# Altium PCB SLT_4U_PEE_V100.PcbDoc (part 6 of 7)
Units mm, origin at the board's own origin, x right, y up, seen from the top; angles counter-clockwise.
Board outline 180 x 80 mm, 6 copper layers (L1 TOP, L2 GND 1, L3 SIGNAL, L4 PWR, L5 GND 2, L6 BOT), stack 1.536 mm thick; 1123 components, 840 nets, 3813 pads, 351 vias.
Unrouted connection lines stored in the file: 2064.
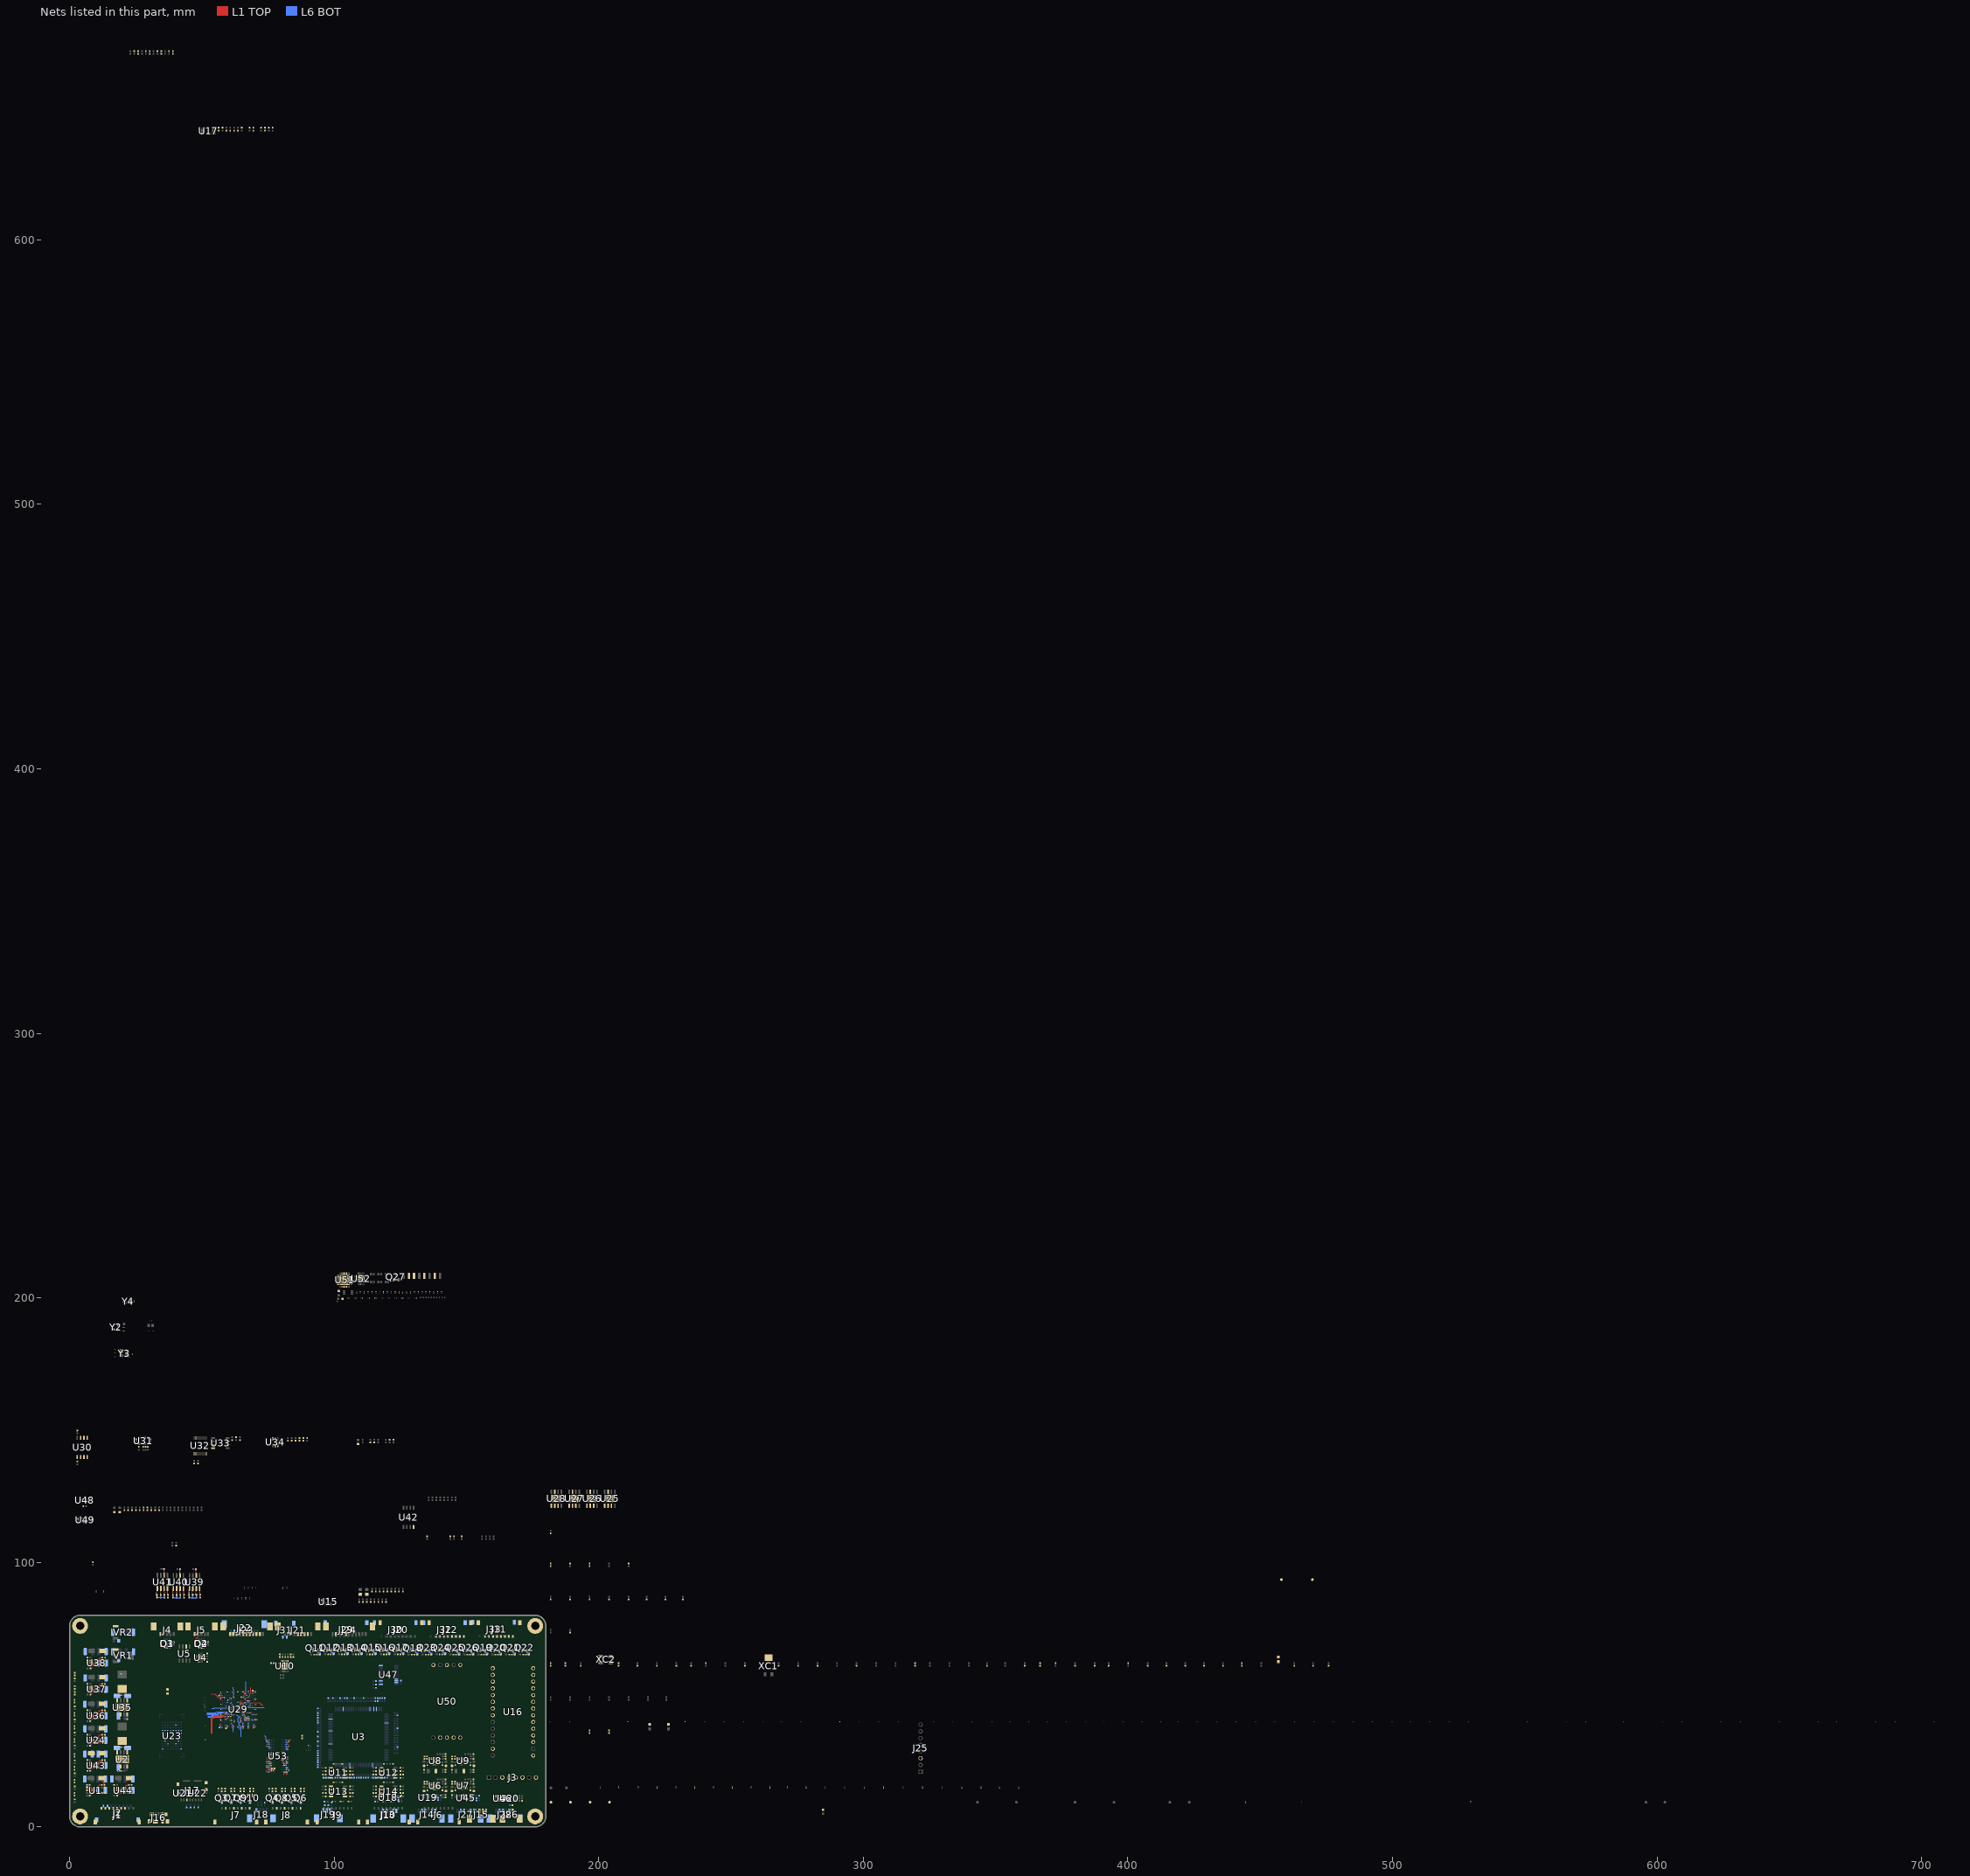
[diagram p6: the nets of this part, all layers, seen from the top]

## Via types
v1: diameter 0.35, hole 0.15, L1 TOP to L6 BOT, 281 vias
v2: diameter 0.4, hole 0.2, L1 TOP to L6 BOT, 61 vias
v3: diameter 0.4, hole 0.2, L1 TOP to L6 BOT, tented both sides, 9 vias

## Nets (pads, with @x,y where several pads share a name; then routed paths per layer and width w, separated by ;. In a path a pad name is that pad's centre, name@x,y a point inside that pad or via, vN(x,y) a via of type N, cw(c..) or ccw(c..) an arc to the next point about the centre after c; other vN are vias at no path point) (continued)
GND: C1.1 C2.1 C3.1 C4.1 C5.1 C6.1 C8.1 C9.1 C10.2 C11.1 C12.1 C13.1 C14.1 C15.1 C16.1 C17.1 C18.1 C19.1 C20.1 C21.2 C22.2 C23.1 C24.1 C25.1 C26.1 C27.1 C28.1 C29.1 C30.1 C31.1 C32.1 C33.1 C34.1 C35.1 C36.1 C37.1 C38.1 C39.1 C40.1 C41.1 C42.1 C43.1 C44.1 C45.1 C46.1 C47.1 C48.1 C49.1 C50.1 C51.1 C52.1 C53.1 C54.1 C57.1 C58.1 C61.1 C62.1 C63.1 C64.1 C65.1 C66.1 C67.1 C68.1 C69.1 C70.1 C71.1 C72.1 C73.1 C74.1 C75.1 C76.1 C79.1 C80.1 C83.1 C84.1 C85.1 C86.1 C87.1 C88.1 C89.1 C90.1 C91.1 C92.1 C93.1 C94.1 C95.1 C96.1 C97.1 C98.1 C99.1 C100.1 C101.1 C102.1 C103.1 C104.1 C105.1 C106.1 C107.1 C108.1 C109.1 C110.1 C111.1 C112.1 C113.1 C114.1 C115.1 C116.1 C117.1 C118.1 C119.1 C120.1 C121.1 C122.1 C123.1 C124.1 C125.1 C126.1 C127.1 C128.1 C129.1 C130.1 C131.1 C132.1 C133.1 C134.1 C135.1 C136.1 C137.1 C138.1 C139.1 C140.1 C141.1 C142.1 C143.1 C144.1 C145.1 C146.1 C147.2 C148.1 C149.1 C150.2 C151.2 C152.2 C153.1 C154.1 C155.1 C156.1 C157.2 C159.1 C160.1 C161.1 C162.1 C163.1 C164.1 C165.1 C166.1 C167.1 C168.1 C169.1 C170.1 C171.1 C172.1 C173.1 C174.1 C175.1 C176.1 C177.1 C178.2 C179.2 C180.2 C181.2 C182.2 C183.2 C184.2 C185.2 C186.2 C187.1 C188.1 C189.1 C190.1 C191.1 C192.1 C193.1 C194.1 C195.1 C196.1 C197.1 C198.1 C199.1 C200.1 C201.1 C202.1 C203.1 C204.1 C205.1 C206.1 C207.1 C208.1 C209.1 C210.1 C211.1 C212.1 C213.1 C214.1 C215.1 C216.1 C217.1 C218.1 C219.1 C220.1 C221.1 C223.1 C225.1 C226.1 C227.1 C228.1 C229.1 C230.1 C231.1 C232.2 C233.2 C234.2 C235.2 C236.2 C237.2 C238.2 C239.2 C240.2 C241.2 C242.2 C243.2 C244.2 C245.2 C246.2 C247.1 C248.2 C249.2 C250.2 C251.2 C252.2 C253.2 C254.2 C255.2 C256.2 C257.2 C258.2 C259.2 C260.2 C261.2 C262.2 C263.2 C264.2 C265.2 C266.2 C267.1 C268.2 C269.2 C270.2 C271.2 C272.2 C273.2 C274.2 C275.2 C276.2 C277.2 C278.2 C279.1 C280.2 C281.2 C282.1 C283.2 C284.2 C285.2 C286.2 C287.2 C288.1 C289.2 C290.1 C291.2 C292.1 C293.2 C294.2 C295.2 C296.2 C297.2 C298.2 C299.1 C300.1 C301.1 C302.1 C303.1 C304.1 C305.1 C306.1 C307.1 C308.1 C309.1 C310.1 C311.1 C312.1 C313.1 C314.1 C315.1 C316.1 C317.1 C318.1 C319.1 C320.1 C321.2 C322.2 C323.2 C324.2 C325.2 C326.2 C327.2 C328.2 C330.2 C331.2 C332.2 C333.2 C334.2 C335.2 C336.2 C337.2 C338.2 C339.2 C340.2 C341.2 C342.2 D1.2 D2.2 D3.2 D4.2 D13.2 D14.2 D15.2 D16.2 D17.2 D18.2 D19.2 H3.1 H4.1 H7.1 H8.1 J1.M1 J1.M2 J2.M1 J2.M2 J3.3 J4.5 J4.M1 J4.M2 J5.5 J5.M1 J5.M2 J6.M1 J6.M2 J7.M1 J7.M2 J8.M1 J8.M2 J9.M1 J9.M2 J10.M1 J10.M2 J11.M1 J11.M2 J12.M1 J12.M2 J13.4 J13.M1 J13.M2 J14.4 J14.M1 J14.M2 J15.4 J15.M1 J15.M2 J16.5 J16.6 J17.G1 J17.G2 J17.G3 J17.G4 J17.P6 J18.4 J18.M1 J18.M2 J19.4 J19.M1 J19.M2 J20.M1 J20.M2 J21.2 J21.M1 J21.M2 J22.2 J22.M1 J22.M2 J23.2 J23.M1 J23.M2 J24.7 J24.10 J24.M1 J24.M2 J25.3 J26.2 J26.M1 J26.M2 J27.4 J27.M1 J27.M2 J28.4 J28.M1 J28.M2 J29.M1 J29.M2 J30.M1 J30.M2 J31.M1 J31.M2 J32.M1 J32.M2 J33.M1 J33.M2 Q3.2 Q4.2 Q5.2 Q6.2 Q7.2 Q8.2 Q9.2 Q10.2 Q11.2 Q12.2 Q13.2 Q14.2 Q15.2 Q16.2 Q17.2 Q18.2 Q19.2 Q20.2 Q21.2 Q22.2 Q23.2 Q24.2 Q25.2 Q26.2 Q27.2 R5.1 R6.1 R8.1 R9.1 R10.1 R110.1 R115.2 R116.2 R122.2 R123.2 R130.2 R132.2 R138.1 R139.2 R140.2 R142.2 R146.1 R147.1 R149.1 R155.1 R156.1 R157.1 R161.1 R162.1 R163.1 R165.1 R167.1 R172.1 R173.1 R178.1 R179.1 R184.1 R185.1 R190.1 R191.1 R194.1 R196.1 R203.2 R204.1 R209.1 R213.2 R217.2 R222.1 R223.2 R224.1 R225.2 R252.2 R253.1 R254.1 R255.1 R256.1 R258.2 R259.2 R261.2 R262.2 R264.2 R265.2 R267.2 R268.2 R295.2 R297.2 R298.2 R301.1 R303.2 R307.1 R310.1 R311.2 R313.2 R315.2 R317.2 R321.1 R323.1 R338.2 R341.1 R348.2 R391.1 R394.1 R409.1 R410.1 R413.1 R414.2 R415.1 R420.1 R421.2 R422.1 R423.1 R428.1 R429.2 R430.1 R431.1 R436.1 R437.2 R438.1 R439.1 R443.1 R448.1 R453.1 R461.1 R462.2 R465.2 R470.1 R471.1 R472.1 R473.1 R478.1 R479.1 R480.1 R481.1 R493.1 R494.1 R495.1 R496.1 R501.1 R502.1 R503.1 R504.1 R505.1 R507.1 R509.1 R536.2 R537.2 R538.2 R539.2 R541.1 R543.2 TP25.0 TP26.0 TP27.0 TP28.0 U1.8 U2.6 U2.9 U3.8 U3.44 U3.61 U3.95 U3.115 U3.135 U3.138 U4.1 U4.17 U5.6 U6.1 U6.5 U6.10 U6.19 U6.21 U6.22 U7.1 U7.5 U7.10 U7.19 U7.21 U7.22 U8.1 U8.5 U8.10 U8.19 U8.21 U8.22 U9.1 U9.5 U9.10 U9.19 U9.21 U9.22 U10.11 U10.25 U10.29 U11.4 U12.4 U13.4 U14.4 U15.3 U16.1 U16.27 U17.4 U18.4 U19.4 U20.4 U21.2 U22.2 U23.G2@42.164,36.48 U23.G3@41.164,36.48 U23.G4@40.164,36.48 U23.G5@39.164,36.48 U23.G6@38.164,36.48 U23.G7@37.164,36.48 U23.G8@36.164,36.48 U23.G9@35.164,36.48 U23.H2@42.164,35.48 U23.H9@35.164,35.48 U23.J5@39.164,34.48 U23.L3@41.164,32.48 U23.L8@36.164,32.48 U23.M4@40.164,31.48 U23.M7@37.164,31.48 U23.P2@42.164,29.48 U23.P9@35.164,29.48 U24.8 U25.1 U25.9 U26.1 U26.9 U27.1 U27.9 U28.1 U28.9 U29.A1 U29.A5 U29.A8 U29.A11 U29.A14 U29.A17 U29.A21 U29.AA1 U29.AA8 U29.AA11 U29.AA14 U29.AA17 U29.AA21 U29.D9 U29.D13 U29.E1 U29.E7 U29.E15 U29.E21 U29.F5 U29.F17 U29.G5 U29.G7 U29.G11 U29.G15 U29.G17 U29.H1 U29.H8 U29.H14 U29.H21 U29.J4 U29.J18 U29.K11 U29.L1 U29.L7 U29.L11 U29.L15 U29.L21 U29.N4 U29.N18 U29.P1 U29.P8 U29.P14 U29.P21 U29.R5 U29.R7 U29.R11 U29.R15 U29.R17 U29.T5 U29.T17 U29.U1 U29.U7 U29.U15 U29.U21 U29.V9 U29.V13 U29.W5 U30.4 U31.6 U32.8 U33.4 U34.2 U35.6 U35.9 U36.8 U37.8 U38.8 U39.2 U40.2 U41.2 U42.4 U43.8 U44.8 U45.4 U46.4 U47.12 U47.21 U48.3 U48.8 U48.9 U49.6 U49.7 U50.5 U50.8 U51.3 U51.12 U51.13 U51.28 U51.29 U51.33 U52.3 U52.17 U53.A9 U53.B1 U53.B3 U53.B9 U53.D1 U53.D8 U53.E1 U53.E2 U53.E8 U53.F9 U53.G1 U53.G8 U53.G9 U53.J2 U53.J8 U53.M1 U53.M9 U53.P1 U53.P9 U53.T1 U53.T9 VR1.1 VR2.1 XC1.3 XC2.2 XC2.4 Y2.2 Y3.2 Y3.4 Y4.2 | length 92.6
  L1 TOP w0.15: v1(59.423,48.065) 59.432,48.056 59.8,48.056 C152.2@59.809,48.047
  L1 TOP w0.25: C258.2@61.15,42.837 61.15,42.425 v1(61.387,42.187) ; C241.2@63.662,50.95 v1(63.662,51.337) ; 70.15,46.512 v1(70.537,46.412) 70.537,45.762
  L1 TOP w0.254: D1.2@12.21,18.415 12.21,17.529 ccw(c12.464,17.529) 12.284,17.349 13.162,16.472 cw(c12.982,16.292) 13.236,16.292 R6.1@13.236,14.867 ; C185.2@35.679,97.536 35.744,97.471 v2@35.744,96.709 ; U41.2@35.745,95.085 35.799,95.943 35.747,95.943 35.747,96.703 v2(35.748,96.704) ; C182.2@41.717,97.504 41.781,97.439 v2@41.781,96.676 ; U40.2@41.783,95.053 41.836,95.911 41.784,95.911 v2(41.785,96.672) v2(41.785,96.672) ; C179.2@47.813,97.504 47.877,97.439 v2@47.877,96.676 ; U39.2@47.879,95.053 47.932,95.911 47.88,95.911 v2(47.881,96.672) v2(47.881,96.672)
  L1 TOP w0.3: C150.2@56.465,49.614 56.514,49.565 56.563,49.565 56.888,50.214 56.894,50.214 C233.2@56.901,50.208 ; C260.2@56.709,37.737 v1(56.834,38.287) 56.891,38.649 C254.2@56.887,38.65 ; v1(56.787,40.562) C255.2@57.139,40.312 ; v1(56.787,42.512) C251.2@57.175,42.512 ; v1(56.787,44.462) C257.2@57.175,44.462 ; v1(56.787,46.412) C242.2@57.175,46.412 ; v1(56.787,48.362) 57.132,48.629 57.126,48.635 57.126,48.658 57.143,48.674 57.156,48.662 57.181,48.662 C234.2@57.181,48.636 ; v1(56.837,50.637) C233.2@56.9,50.237 ; C255.2@57.14,40.288 C255.2@57.14,40.312 ; v1(58.737,43.162) 58.762,43.187 C239.2@59.1,43.187 ; v1(58.737,45.762) 59.104,45.762 C240.2@59.104,45.752 ; C256.2@59.01,40.825 59.061,40.825 59.084,40.847 59.084,40.854 v1(59.437,40.887) ; C244.2@59.112,37.319 59.753,37.849 C253.2@59.766,37.99 ; v1(59.762,37.587) C253.2@59.762,37.975 ; C235.2@59.762,50.95 v1(59.762,51.337) ; C152.2@59.812,48.05 C152.2@59.825,48.037 ; C270.2@60.087,41.8 v1(60.087,42.187) 60.087,42.637 ; C247.1@60.737,41.8 v1(60.737,42.187) ; C252.2@60.987,46.8 v1(61.387,46.737) ; C248.2@61,40.237 v1(61.387,40.237) ; C151.2@61.019,48.687 v1(61.387,48.687) ; v1(61.387,46.087) C259.2@61.45,45.687 ; v1(61.712,37.587) C243.2@61.712,37.975 ; C236.2@61.712,50.95 v1(61.712,51.337) ; v1(62.362,39.537) C238.2@62.362,39.925 ; C237.2@62.362,49 v1(62.362,49.387) ; C335.2@62.95,42.187 63.308,42.187 v1(63.314,42.181) ; C331.2@63.355,44.433 63.355,44.771 v1(63.364,44.781) ; v1(63.987,44.787) C332.2@64.387,44.725 ; v1(64.637,39.587) C338.2@64.637,39.975 ; C250.2@64.887,46.625 v1(65.287,46.737) 64.887,47.15 ; C249.2@64.962,49.075 v1(64.962,49.437) ; v1(65.612,37.137) C325.2@65.612,37.55 ; C266.2@65.612,50.95 v1(65.612,51.337) 65.65,51.3 66.187,51.3 ; v1(65.937,42.187) 65.939,42.189 65.939,42.64 C339.2@65.938,42.641 ; C336.2@66.187,40.3 v1(66.587,40.237) ; C262.2@66.2,46.987 v1(66.587,46.737) C269.2@66.65,46.337 ; C246.2@66.587,48.3 v1(66.587,48.685) 66.587,49.075 ; C326.2@66.85,41.537 67.237,41.537 67.312,41.15 ; v1(67.237,47.387) C277.2@67.237,47.775 ; v1(67.539,38.531) 67.549,38.521 67.549,38.163 C330.2@67.562,38.15 ; C263.2@67.562,50.95 67.562,51.412 v1(67.587,51.437) ; v1(67.88,41.481) 67.887,41.473 C324.2@67.887,41.15 ; v1(67.887,47.387) C278.2@67.887,47.775 ; C322.2@68.2,43.162 v1(68.587,43.162) ; C271.2@68.256,45.762 v1@68.706,45.762 ; C261.2@69.212,51.537 v1(69.837,51.287) C268.2@70.237,51.225 ; 69.412,37.175 69.412,37.7 v1(69.837,37.637) ; C245.2@70.157,44.462 v1(70.537,44.462) ; C264.2@70.189,48.362 v1(70.537,48.362) ; C327.2@70.45,42.512 v1(70.862,42.512) ; C334.2@70.6,40.562 v1(71.012,40.562) ; C311.1@74.431,21.533 74.439,21.525 74.462,21.525 v1(74.862,21.662) ; C313.1@74.462,23.125 v1(74.862,23.262) ; C317.1@74.462,24.2 v1(74.862,24.062) ; C321.2@74.462,25.662 v1(74.862,25.662) ; C310.1@74.462,31.125 v1(74.862,31.262) ; C308.1@74.462,32.725 v1(74.862,32.862) ; v1(75.862,24.462) C318.1@75.862,25 ; C315.1@75.862,23.925 v1(75.862,24.462) ; C306.1@76.525,27.262 v1(76.662,27.662) ; C302.1@76.875,21.262 v1(77.462,21.262) C301.1@77.462,22.062 ; C305.1@80.309,27.792 v1(80.662,27.662) ; v1(80.662,23.662) C303.1@80.8,23.262 ; v1(80.662,24.462) C304.1@80.775,25.262 ; C312.1@81.725,20.662 81.728,20.653 81.73,20.645 v1(81.862,20.262) ; C314.1@82.062,21.8 v1(82.462,21.662) ; C316.1@82.062,24.725 v1(82.462,24.862) ; C319.1@82.062,25.8 82.068,25.798 v1(82.462,25.662) ; C341.2@82.462,29.262 v1(82.462,29.662) ; v1(82.462,31.262) 82.862,31.125 82.872,31.125 C309.1@82.876,31.121 ; v1(82.462,32.862) 82.862,32.725 82.878,32.725 83.09,32.937 83.487,32.937 83.687,33.137
  L1 TOP w0.35: v1(81.862,20.262) 81.912,19.737
  L6 BOT w0.2: U53.T9@81.862,32.862 v1(82.462,32.862)
  L6 BOT w0.25: U29.A11@63.662,50.969 v1(63.662,51.337)
  L6 BOT w0.254: C184.2@35.679,97.536 35.72,97.495 35.72,96.732 v2(35.748,96.704) ; C181.2@41.717,97.504 41.758,97.463 41.758,96.7 v2(41.785,96.672) ; C178.2@47.813,97.504 47.854,97.463 47.854,96.7 v2(47.881,96.672)
  L6 BOT w0.3: v1(56.787,40.562) U29.U21@57.162,40.562 ; v1(56.787,42.512) U29.P21@57.162,42.512 ; v1(56.787,44.462) U29.L21@57.162,44.462 ; v1(56.787,46.412) U29.H21@57.162,46.412 ; v1(56.787,48.362) U29.E21@57.162,48.362 ; v1(56.834,38.287) 56.837,38.287 U29.AA21@57.162,37.962 ; v1(56.837,50.637) U29.A21@57.162,50.962 ; v1(58.737,43.162) U29.N18@59.112,43.162 ; v1(58.737,45.762) U29.J18@59.112,45.762 ; v1(59.423,48.065) 59.423,48.051 U29.F17@59.762,47.712 ; v1(59.437,40.887) U29.T17@59.762,41.212 ; v1(59.439,47.356) 59.453,47.356 59.621,47.187 59.637,47.187 U29.G17@59.762,47.062 ; v1(59.762,37.587) U29.AA17@59.762,37.962 ; U29.R17@59.762,41.862 v1(60.087,42.187) ; U29.A17@59.762,50.962 v1(59.762,51.337) ; v1(60.687,44.462) U29.L15@61.062,44.462 ; v1(60.737,42.187) U29.R15@61.062,41.862 ; U29.U15@61.062,40.562 v1(61.387,40.237) ; U29.G15@61.062,47.062 v1(61.387,46.737) ; U29.E15@61.062,48.362 v1(61.387,48.687) ; v1(61.387,42.187) U29.P14@61.712,42.512 ; v1(61.387,46.087) U29.H14@61.712,46.412 ; v1(61.712,37.587) U29.AA14@61.712,37.962 ; U29.A14@61.712,50.962 v1(61.712,51.337) ; v1(62.362,39.537) U29.V13@62.362,39.912 ; U29.D13@62.362,49.012 v1(62.362,49.387) ; v1(63.314,42.181) 63.328,42.181 63.646,41.862 U29.R11@63.662,41.862 ; v1(63.364,44.781) 63.374,44.771 63.374,44.75 U29.L11@63.662,44.462 ; v1(63.662,37.587) U29.AA11@63.662,37.962 ; U29.K11@63.662,45.112 v1(63.987,44.787) ; U29.G11@63.662,47.062 v1(63.662,47.437) ; v1(64.637,39.587) U29.V9@64.962,39.912 ; U29.D9@64.962,49.012 v1(64.962,49.437) ; v1(65.287,46.737) U29.H8@65.612,46.412 ; v1(65.314,42.206) 65.314,42.214 U29.P8@65.612,42.512 ; v1(65.612,37.137) U29.AA8@65.612,37.962 ; U29.A8@65.612,50.962 v1(65.612,51.337) ; v1(65.937,42.187) U29.R7@66.262,41.862 ; U29.U7@66.262,40.562 v1(66.587,40.237) ; U29.L7@66.262,44.462 v1(66.637,44.462) ; U29.G7@66.262,47.062 v1(66.587,46.737) ; U29.E7@66.262,48.362 v1(66.587,48.685) ; v1@67.237,41.537 U29.T5@67.562,41.212 ; v1(67.237,47.387) U29.F5@67.562,47.712 ; v1(67.539,38.531) 67.539,38.544 67.687,38.692 67.687,39.137 U29.W5@67.562,39.262 ; U29.R5@67.562,41.862 67.87,41.554 67.87,41.49 v1(67.88,41.481) ; U29.G5@67.562,47.062 v1(67.887,47.387) ; U29.A5@67.562,50.962 67.562,51.412 v1(67.587,51.437) ; U29.N4@68.212,43.162 v1(68.587,43.162) ; U29.J4@68.212,45.762 69.087,45.762 ; v1(69.837,37.637) U29.AA1@70.162,37.962 ; v1(69.837,51.287) U29.A1@70.162,50.962 ; U29.U1@70.162,40.562 v1@70.862,40.562 ; U29.P1@70.162,42.512 v1(70.862,42.512) ; U29.L1@70.162,44.462 v1(70.537,44.462) ; U29.H1@70.162,46.412 v1(70.537,46.412) ; U29.E1@70.162,48.362 v1(70.537,48.362) ; U53.P9@81.862,31.262 81.887,31.237 82.388,31.237 82.413,31.262 v1(82.462,31.262)
  L6 BOT w0.4: v1(74.862,21.662) U53.B1@75.462,21.662 ; v1(74.862,23.262) U53.D1@75.462,23.262 ; v1(74.862,24.062) U53.E1@75.462,24.062 ; v1(74.862,25.662) U53.G1@75.462,25.662 ; v1(74.862,31.262) U53.P1@75.462,31.262 ; v1(74.862,32.862) U53.T1@75.462,32.862 ; U53.M1@75.462,29.662 75.837,30.037 v1(75.862,30.037) ; v1(75.862,24.462) U53.E2@76.262,24.062 ; U53.J2@76.262,27.262 v1(76.662,27.662) ; U53.B3@77.062,21.662 v1(77.462,21.262) ; v1(80.662,23.662) U53.D8@81.062,23.262 ; v1(80.662,24.462) U53.E8@81.062,24.062 ; v1(80.662,26.062) U53.G8@81.062,25.662 ; v1(80.662,27.662) U53.J8@81.062,27.262 ; v1(81.862,20.262) U53.A9@81.862,20.862 ; U53.B9@81.862,21.662 v1(82.462,21.662) ; U53.F9@81.862,24.862 v1(82.462,24.862) ; U53.G9@81.862,25.662 v1(82.462,25.662) ; U53.M9@81.862,29.662 v1(82.462,29.662)
  other v1: 67.237,41.562 68.757,45.762
  other v2: 18.542,21.336
  other v3: 102.815,205.554 104.015,205.554 105.215,205.554 102.815,206.754 104.015,206.754 105.215,206.754 102.815,207.954 104.015,207.954 105.215,207.954
HD4_A0: R193.2 R194.2 U16.3
HD4_A1: R195.2 R196.2 U16.4
HD4_CH11+: J12.7 U16.16
HD4_CH11-: J12.8 U16.15
HD4_CH12+: J12.6 U16.17
HD4_CH12-: J12.5 U16.18
HD4_CH21+: J12.3 U16.20
HD4_CH21-: J12.4 U16.19
HD4_CH22+: J12.2 U16.21
HD4_CH22-: J12.1 U16.22
HD4_CH31+: J11.2 U16.8
HD4_CH31-: J11.1 U16.7
HD4_CH32+: J11.3 U16.9
HD4_CH32-: J11.4 U16.10
HD4_CH41+: J11.6 U16.12
HD4_CH41-: J11.5 U16.11
HD4_CH42+: J11.7 U16.13
HD4_CH42-: J11.8 U16.14
HEATER_B_1: D5.2 J7.2 Q3.3
HEATER_B_2: D9.2 J7.4 Q7.3
HEATER_B_3: D11.2 J7.6 Q9.3
HEATER_B_4: D12.2 J7.8 Q10.3
HEATER_B_5: D6.2 J8.2 Q4.3
HEATER_B_6: D10.2 J8.4 Q8.3
HEATER_B_7: D7.2 J8.6 Q5.3
HEATER_B_8: D8.2 J8.8 Q6.3
HEATER_PWM_1: R52.2 R152.1
HEATER_PWM_2: R11.2 R159.1
HEATER_PWM_3: R13.2 R164.1
HEATER_PWM_4: R50.2 R166.1
HEATER_PWM_5: R74.2 R153.1
HEATER_PWM_6: R101.2 R160.1
HEATER_PWM_7: R70.2 R154.1
HEATER_PWM_8: R71.2 R158.1
I2C_SCL: R199.2 U16.6 U17.7
I2C_SDA: R200.2 U16.5 U17.6
IF_12V: C3.2 C4.2 J1.1 J1.2 J1.3 JP1.1 R1.2 U1.5
IF_GND: J1.4 J1.5 J1.6
IF_MCU_SHUTDOWN: J1.7 R18.1@475.831,60.985
IF_SOM_USB_N: J2.8 R299.1
IF_SOM_USB_P: J2.7 R300.1
LASER_ADC_1: J23.10 R108.2
LASER_ADC_2: J23.11 R278.2
LASER_DAC_LATCH: J23.7 R91.2 R292.2
LASER_SPI_nCS1: J23.6 R59.2 R291.2
LASER_SW_EXT_CS: J23.9 R37.2 R294.2
LASER_SW_INT_CS: J23.8 R72.2 R293.2
LP_12V: C192.2 C193.2 D18.1 DS9.2 JP10.2 R136.2 R137.2 U43.6
LPM: Q27.1 R331.1 U29.R10 | length 7.6
  L6 BOT w0.1: 64.15,37 64.287,37.137 64.287,38.362 63.987,38.662 63.987,39.487 63.612,39.862 63.612,40.987 64.312,41.687 U29.R10@64.312,41.862
  L6 BOT w0.125: 82.437,19.962 82.437,20.812 82.962,21.337 82.962,21.826
LSM6DSOX_INT: R99.2 R296.2 U49.4
MCP16502_HPM: R333.1 R386.1 R533.2 R536.1
MCU_CONSOLE_RX: J19.3 R49.1 R247.1
MCU_CONSOLE_TX: J19.2 R51.1 R246.1
MCU_HD4_I2C2_SCL: R55.1 R197.2 U17.2 U47.22
MCU_HD4_I2C2_SDA: R53.1 R198.2 U17.3 U47.23
MCU_HD4_I2C_EN: R93.2 R203.1 U17.5
MCU_I2C0_SCL: R18.2@93.836,26.162 R145.1 R399.1 U10.24 U31.4
MCU_I2C0_SDA: R17.2 R144.1 R400.1 U10.27 U31.5
MCU_JTAGSEL: TP2.0 U3.104
MCU_MPD_DAC: R96.1 U50.2
MCU_MPD_EN: R25.1@470.006,60.985 U50.3
MCU_MPD_PWM: R279.1 U50.4
MCU_MRAM_QSPI_CLK: R34.2 U30.6
MCU_MRAM_QSPI_IO0: R32.2 U30.5
MCU_MRAM_QSPI_IO1: R30.2 U30.2
MCU_MRAM_QSPI_IO2: R38.2 U30.3
MCU_MRAM_QSPI_IO3: R60.1 U30.7
MCU_nRESET: J3.6 R63.1 U3.83
MCU_OSCIN: C19.2 R90.1 R109.2 XC2.3
MCU_OSCOUT: C20.2 R92.1 R109.1 XC2.1
MCU_PRAM_SPI1_nCS: R105.2 R288.1 U32.2
MCU_PRAM_SW_nEN: R35.1 R405.1 U32.15
MCU_RAM_QSPI_nCS: R28.2 R396.1 U30.1
MCU_RTC_CLKOUT: R68.2 R397.1 U31.3
MCU_RTC_INT: R69.2 R398.1 U31.7
MCU_SENSOR1_nIRQ: J13.1 R126.1
MCU_SENSOR2_nIRQ: J14.1 R127.1
MCU_SENSOR3_nIRQ: J27.1 R57.2
MCU_SENSOR4_nIRQ: J28.1 R277.2
MCU_SOL_1_IN1: R15.2 U25.3
MCU_SOL_1_IN2: R97.2 U25.2
MCU_SOL_2_IN1: R40.1 U26.3
MCU_SOL_2_IN2: R39.1 U26.2
MCU_SOL_3_IN1: R46.2 U27.3
MCU_SOL_3_IN2: R44.2 U27.2
MCU_SOL_4_IN1: R48.2 U28.3
MCU_SOL_4_IN2: R47.2 U28.2
MCU_SOM_GPIO_A: R25.1@99.568,48.658
MCU_SOM_GPIO_B: R27.1 R388.1
MCU_SPI0_MISO: J21.5 J23.4 R42.1 R141.2
MCU_SPI0_MOSI: J21.4 J23.3 R43.1
MCU_SPI0_SCK: J21.3 J23.5 R45.1
MCU_STATUS_LED_1: DS11.1 R94.1
MCU_SWDIO: J3.8 R85.1
MCU_TRACESWO: J3.4 R83.1
MCU_TST: TP1.0 U3.85
MCU_TSWCLK: J3.5 R88.1
MCU_UART0_RX_SOM_TX: R24.2 R528.1
MCU_UART0_TX_SOM_RX: R26.2@100.457,18.652 R529.1
MCU_UART1_RX_SOM_TX: R20.2 R525.1
MCU_UART1_TX_SOM_RX: R22.2 R527.1
MIPI_CK_N: R312.2 U29.N20 | length 6.1
  L6 BOT w0.1: 52.037,42.487 56.237,42.487 56.612,42.862 57.312,42.862 57.612,43.162 U29.N20@57.812,43.162
MIPI_CK_P: R314.2 U29.N21 | length 5.3
  L6 BOT w0.1: 52.037,42.787 56.113,42.787 56.488,43.162 U29.N21@57.162,43.162
MIPI_D0_N: R316.2 U29.R18 | length 11.9
  L1 TOP w0.1: 53.987,35.238 53.987,41.037 54.284,41.334 54.391,41.334 54.462,41.262 54.562,41.262 54.687,41.387 54.687,41.462 54.605,41.544 54.605,41.655 54.837,41.887 56.493,41.887 56.518,41.862 57.967,41.862 57.992,41.887 58.282,41.887 58.396,41.773 58.549,41.773 58.769,41.553 58.771,41.555 v1(58.786,41.555)
  L6 BOT w0.1: v1(58.786,41.555) 58.787,41.553 58.794,41.553 59.103,41.862 U29.R18@59.112,41.862
MIPI_D0_P: R318.2 U29.P18 | length 11.9
  L1 TOP w0.1: 53.687,35.362 53.687,41.161 54.713,42.187 56.617,42.187 56.642,42.162 58.431,42.162 58.521,42.073 58.605,42.073 58.719,42.187 v1(58.787,42.187)
  L6 BOT w0.1: v1(58.787,42.187) U29.P18@59.112,42.512
MIPI_D1_N: R319.2 U29.R20 | length 5.6
  L6 BOT w0.1: 52.362,41.537 57.512,41.537 57.812,41.837 U29.R20@57.812,41.862
MIPI_D1_P: R320.2 U29.R21 | length 4.9
  L6 BOT w0.1: 52.238,41.837 U29.R21@57.162,41.837
NetC5_2: C5.2 U1.10 | length 2.6
  L1 TOP w0.254: U1.10@10.826,14.543 10.63,14.739 10.63,15.224 cw(c10.884,15.224) 10.704,15.403 11.11,15.809 cw(c11.289,15.629) 11.289,15.883 C5.2@12.186,15.883
NetC6_2: C6.2 U1.7 | length 1.6
  L1 TOP w0.254: U1.7@10.827,13.142 11.932,13.142 cw(c11.932,12.888) 12.167,12.985 C6.2@12.186,12.835
NetC7_1: C7.1 D2.1 L1.1 U2.8
NetC7_2: C7.2 U2.1
NetC15_2: C15.2 R61.1 R62.1 R63.2
NetC18_2: C18.2 R110.2 U3.140
NetC59_1: C59.1 L2.1 U6.6 U6.7
NetC59_2: C59.2 U6.3
NetC60_1: C60.1 L3.1 U7.6 U7.7
NetC60_2: C60.2 U7.3
NetC63_2: C63.2 U6.2
NetC64_2: C64.2 U7.2
NetC81_1: C81.1 L4.1 U8.6 U8.7
NetC81_2: C81.2 U8.3
NetC82_1: C82.1 L5.1 U9.6 U9.7
NetC82_2: C82.2 U9.3
NetC85_2: C85.2 U8.2
NetC86_2: C86.2 U9.2
NetC91_2: C91.2 R170.2 U11.3
NetC93_2: C93.2 R171.2 U12.3
NetC97_2: C97.2 R176.2 U11.5
NetC100_2: C100.2 R177.2 U12.5
NetC103_2: C103.2 R182.2 U13.3
NetC105_2: C105.2 R183.2 U14.3
NetC109_2: C109.2 R188.2 U13.5
NetC112_2: C112.2 R189.2 U14.5
NetC128_2: C128.2 C129.2 U23.E4@40.164,38.48
NetC145_2: C145.2 U24.10 | length 2.5
  L1 TOP w0.254: U24.10@10.953,33.466 10.768,33.651 10.768,33.904 cw(c11.022,33.904) 10.842,34.083 11.447,34.688 cw(c11.626,34.508) 11.626,34.762 12.138,34.762 C145.2@12.313,34.806
NetC146_2: C146.2 U24.7 | length 1.5
  L1 TOP w0.254: U24.7@10.953,32.066 11.9,32.066 cw(c11.9,31.812) 12.079,31.992 12.163,31.908 C146.2@12.313,31.758
NetC158_1: C158.1 D14.1 L6.1 U35.8
NetC158_2: C158.2 U35.1
NetC166_2: C166.2 U36.10 | length 2.5
  L1 TOP w0.254: U36.10@10.953,42.737 10.768,42.922 10.768,43.175 cw(c11.022,43.175) 10.842,43.354 11.447,43.959 cw(c11.626,43.779) 11.626,44.033 12.138,44.033 C166.2@12.313,44.077
NetC167_2: C167.2 U36.7 | length 1.5
  L1 TOP w0.254: U36.7@10.953,41.337 11.9,41.337 cw(c11.9,41.083) 12.079,41.263 12.163,41.179 C167.2@12.313,41.029
NetC171_2: C171.2 U37.10 | length 2.5
  L1 TOP w0.254: U37.10@11.037,52.738 10.852,52.923 10.852,53.176 cw(c11.106,53.176) 10.926,53.355 11.531,53.96 cw(c11.71,53.78) 11.71,54.034 12.222,54.034 C171.2@12.397,54.078
NetC172_2: C172.2 U37.7 | length 1.5
  L1 TOP w0.254: U37.7@11.037,51.338 11.984,51.338 cw(c11.984,51.084) 12.163,51.264 12.247,51.18 C172.2@12.397,51.03
NetC175_2: C175.2 C190.2 JP7.2 JP8.2 JP9.1 R433.2 U38.5
NetC176_2: C176.2 U38.10 | length 2.5
  L1 TOP w0.254: U38.10@11.052,62.668 10.867,62.853 10.867,63.106 cw(c11.121,63.106) 10.941,63.285 11.546,63.89 cw(c11.725,63.71) 11.725,63.964 12.237,63.964 C176.2@12.412,64.008
NetC177_2: C177.2 U38.7 | length 1.5
  L1 TOP w0.254: U38.7@11.052,61.268 11.999,61.268 cw(c11.999,61.014) 12.178,61.194 12.262,61.11 C177.2@12.412,60.96
NetC180_1: C180.1 R441.1 R442.2 U39.5 | length 6.8
  L1 TOP w0.254: C180.1@45.154,87.717 45.152,87.718 45.152,88.567 v2(45.151,88.568) 45.179,88.596 45.179,89.953 U39.5@45.339,90.113
  L6 BOT w0.254: v2(45.151,88.568) 45.154,88.566 45.154,87.274 ccw(c45.408,87.274) 45.227,87.095 45.556,86.766 ccw(c45.736,86.946) 45.736,86.692 46.401,86.692 R442.2@46.551,86.692 R441.1@47.948,86.692
NetC183_1: C183.1 R446.1 R447.2 U40.5 | length 6.8
  L1 TOP w0.254: C183.1@39.058,87.717 39.056,87.718 39.056,88.567 v2(39.055,88.568) 39.083,88.596 39.083,89.953 U40.5@39.243,90.113
  L6 BOT w0.254: v2(39.055,88.568) 39.058,88.566 39.058,87.274 ccw(c39.312,87.274) 39.131,87.095 39.46,86.766 ccw(c39.64,86.946) 39.639,86.692 40.305,86.692 R447.2@40.455,86.692 R446.1@41.852,86.692
NetC186_1: C186.1 R451.1 R452.2 U41.5 | length 6.8
  L1 TOP w0.254: C186.1@33.02,87.749 33.019,87.75 33.019,88.599 v2(33.018,88.6) 33.046,88.628 33.046,89.986 U41.5@33.205,90.145
  L6 BOT w0.254: v2(33.018,88.6) 33.02,88.598 33.02,87.306 ccw(c33.274,87.306) 33.094,87.127 33.423,86.798 ccw(c33.602,86.978) 33.602,86.724 R451.1@35.814,86.724
NetC196_2: C196.2 U43.10 | length 2.5
  L1 TOP w0.254: U43.10@10.95,23.941 10.765,24.126 10.765,24.379 cw(c11.019,24.379) 10.839,24.558 11.444,25.163 cw(c11.623,24.983) 11.623,25.237 12.135,25.237 C196.2@12.31,25.281
NetC197_2: C197.2 U43.7 | length 1.5
  L1 TOP w0.254: U43.7@10.95,22.541 11.897,22.541 cw(c11.897,22.287) 12.076,22.467 12.16,22.383 C197.2@12.31,22.233
NetC202_2: C202.2 U44.10 | length 2.5
  L1 TOP w0.254: U44.10@21.116,14.543 20.931,14.728 20.931,14.981 cw(c21.185,14.981) 21.005,15.16 21.61,15.765 cw(c21.789,15.585) 21.789,15.839 22.301,15.839 C202.2@22.476,15.883
NetC203_2: C203.2 U44.7 | length 1.5
  L1 TOP w0.254: U44.7@21.116,13.143 22.063,13.143 cw(c22.063,12.889) 22.242,13.069 22.326,12.985 C203.2@22.476,12.835
NetC300_2: C300.2 R340.1 R402.1 R535.1 U29.J7 U51.2 | length 7.6
  L6 BOT w0.1: U29.J7@66.262,45.762 66.3,45.724 66.491,45.724 66.791,45.423 67.501,45.423 67.712,45.212 73.609,45.212
NetC301_2: C301.2 C302.2 U53.B2 | length 2.5
  L1 TOP w0.3: C302.2@76.35,21.262 76.012,21.262 75.862,21.412 v1(75.862,22.062) C301.2@76.562,22.062
  L6 BOT w0.4: v1(75.862,22.062) U53.B2@76.262,21.662
NetC303_2: C303.2 U53.D9 | length 1
  L1 TOP w0.3: C303.2@81.325,23.262 v1(81.462,23.662)
  L6 BOT w0.4: v1(81.462,23.662) U53.D9@81.862,23.262
NetC304_2: C304.2 U53.G7 | length 1
  L1 TOP w0.3: v1(79.862,25.262) C304.2@80.25,25.262
  L6 BOT w0.4: v1(79.862,25.262) U53.G7@80.262,25.662
NetC305_2: C305.2 U53.K8 | length 0.9
  L1 TOP w0.3: C305.2@80.309,28.333 v1(80.662,28.462)
  L6 BOT w0.4: v1(80.662,28.462) U53.K8@81.062,28.062
NetC306_2: C306.2 U53.K2 | length 1
  L1 TOP w0.3: v1(75.862,27.662) C306.2@76,27.262
  L6 BOT w0.4: v1(75.862,27.662) U53.K2@76.262,28.062
NetC307_2: C307.2 U53.R9 | length 1
  L1 TOP w0.3: v1(82.462,32.062) C307.2@82.862,32.2
  L6 BOT w0.2: U53.R9@81.862,32.062 v1@82.413,32.062
NetC308_2: C308.2 U53.R1 | length 3.9
  L1 TOP w0.3: C308.2@74.462,32.2 v1(74.862,32.062)
  L6 BOT w0.2: 74,34.562 74,34.275 74.212,34.062 74.212,32.712 v1(74.862,32.062)
  L6 BOT w0.4: v1(74.862,32.062) U53.R1@75.462,32.062
NetC309_2: C309.2 U53.N9 | length 1
  L1 TOP w0.3: v1(82.462,30.462) 82.862,30.6 82.872,30.6 C309.2@82.876,30.596
  L6 BOT w0.4: U53.N9@81.862,30.462 v1(82.462,30.462)
NetC310_2: C310.2 U53.N1 | length 1
  L1 TOP w0.3: C310.2@74.462,30.6 v1(74.862,30.462)
  L6 BOT w0.4: v1(74.862,30.462) U53.N1@75.462,30.462
NetC311_2: C311.2 U53.A1 | length 1.1
  L1 TOP w0.3: C311.2@74.431,21.008 74.439,21 74.462,21 v1(74.862,20.862)
  L6 BOT w0.4: v1(74.862,20.862) U53.A1@75.462,20.862
NetC312_2: C312.2 U53.A8 | length 1.6
  L1 TOP w0.3: v1(81.062,20.262) 81.196,20.652 81.199,20.659 C312.2@81.2,20.662
  L1 TOP w0.35: 81.012,19.737 v1(81.062,20.262)
  L6 BOT w0.4: v1(81.062,20.262) U53.A8@81.062,20.862
NetC313_2: C313.2 U53.C1 | length 1
  L1 TOP w0.3: C313.2@74.462,22.6 v1(74.862,22.462)
  L6 BOT w0.4: v1(74.862,22.462) U53.C1@75.462,22.462
NetC314_2: C314.2 U53.C9 | length 1
  L1 TOP w0.3: C314.2@82.062,22.325 v1(82.462,22.462)
  L6 BOT w0.4: U53.C9@81.862,22.462 v1(82.462,22.462)
NetC315_2: C315.2 U53.D2 | length 1.1
  L1 TOP w0.3: v1(75.862,22.862) 75.862,23.379 C315.2@75.862,23.4
  L6 BOT w0.4: v1(75.862,22.862) U53.D2@76.262,23.262
NetC316_2: C316.2 U53.E9 | length 1
  L1 TOP w0.3: C316.2@82.061,24.2 v1(82.462,24.062)
  L6 BOT w0.4: U53.E9@81.862,24.062 v1(82.462,24.062)
NetC317_2: C317.2 U53.F1 | length 1
  L1 TOP w0.3: C317.2@74.462,24.725 v1(74.862,24.862)
  L6 BOT w0.4: v1(74.862,24.862) U53.F1@75.462,24.862
NetC318_2: C318.2 U53.H2 | length 1.1
  L1 TOP w0.3: C318.2@75.862,25.525 v1(75.862,26.062)
  L6 BOT w0.4: v1(75.862,26.062) U53.H2@76.262,26.462
NetC319_2: C319.2 C320.2 U53.H9 | length 1
  L1 TOP w0.3: C319.2@82.062,26.325 C319.2@82.069,26.326 v1(82.462,26.462)
  L6 BOT w0.4: U53.H9@81.862,26.462 v1(82.462,26.462)
NetC322_1: C322.1 U29.N6 | length 0.8
  L1 TOP w0.3: v1(67.287,43.162) C322.1@67.675,43.162
  L6 BOT w0.3: U29.N6@66.912,43.162 v1(67.287,43.162)
NetC323_1: C323.1 C324.1 C325.1 C326.1 C327.1 C328.1 C330.1 C331.1 C332.1 C334.1 C335.1 C336.1 C338.1 C339.1 C340.1 U29.AA5 U29.M11 U29.N9 U29.N12 U29.P3 U29.P13 U29.T6 U29.T7 U29.T9 U29.U3 U29.U5 U29.U6 U29.W8 U29.Y2 | length 14.3
  L1 TOP w0.3: v1(62.037,42.187) C335.1@62.425,42.187 ; v1(63.337,43.487) C331.1@63.337,43.875 ; v1(63.987,44.137) C332.1@64.366,44.196 ; v1(64.614,40.856) 64.624,40.846 64.624,40.513 C338.1@64.637,40.5 ; v1(65.287,42.837) 65.789,43.166 C339.1@65.938,43.166 ; v1(65.564,38.481) 65.574,38.471 65.574,38.113 C325.1@65.612,38.075 ; v1(65.937,41.537) C326.1@66.325,41.537 ; C336.1@66.187,40.825 v1(66.587,40.887) ; v1@67.237,40.237 67.312,40.625 ; v1(67.562,37.237) C330.1@67.562,37.625 ; v1(67.887,40.237) C324.1@67.887,40.625 ; C328.1@69.412,38.225 v1(69.837,38.287) ; v1(69.512,42.512) C327.1@69.925,42.512 ; v1(69.662,40.562) C334.1@70.075,40.562
  L1 TOP w0.35: v1(69.837,38.287) 70.437,37.912
  L6 BOT w0.3: v1(62.037,42.187) U29.P13@62.362,42.512 ; U29.N12@63.012,43.162 v1(63.337,43.487) ; U29.M11@63.662,43.812 v1(63.987,44.137) ; v1(64.614,40.856) 64.614,40.864 U29.T9@64.962,41.212 ; U29.N9@64.962,43.162 v1(65.287,42.837) ; v1(65.564,38.481) 65.564,39.214 U29.W8@65.612,39.262 ; v1(65.937,41.537) U29.T7@66.262,41.212 ; v1(66.587,40.887) U29.T6@66.912,41.212 ; U29.U6@66.912,40.562 v1@67.237,40.237 ; v1(67.562,37.237) U29.AA5@67.562,37.962 ; U29.U5@67.562,40.562 v1@67.862,40.262 ; U29.U3@68.862,40.562 68.987,40.437 69.524,40.437 69.649,40.562 v1(69.662,40.562) ; U29.P3@68.862,42.512 v1(69.512,42.512) ; U29.Y2@69.512,38.612 v1(69.837,38.287)
  other v1: 67.237,40.186
NetD20_2: D20.2 DZ1.2 | length 4.6
  L6 BOT w0.254: DZ1.2@91.156,68.323 91.469,68.01 91.741,68.01 94.006,65.744 94.245,65.744 94.568,65.421 D20.2@94.568,65.408
NetD21_2: D21.2 DZ2.2 | length 4.6
  L6 BOT w0.254: DZ2.2@96.422,68.45 96.735,68.137 97.007,68.137 99.273,65.871 99.511,65.871 99.834,65.548 D21.2@99.834,65.535
NetD22_2: D22.2 DZ3.2 | length 4.6
  L6 BOT w0.254: DZ3.2@101.688,68.45 102.001,68.137 102.273,68.137 104.539,65.871 104.778,65.871 105.101,65.548 D22.2@105.101,65.535
NetD23_2: D23.2 DZ4.2 | length 4.6
  L6 BOT w0.254: DZ4.2@106.955,68.45 107.268,68.137 107.54,68.137 109.805,65.871 110.044,65.871 110.367,65.548 D23.2@110.367,65.535
NetD24_2: D24.2 DZ5.2 | length 4.6
  L6 BOT w0.254: DZ5.2@112.221,68.434 112.534,68.121 112.806,68.121 115.071,65.855 115.31,65.855 115.633,65.532 D24.2@115.633,65.519
NetD25_2: D25.2 DZ6.2 | length 4.6
  L6 BOT w0.254: DZ6.2@117.487,68.45 117.8,68.137 118.072,68.137 120.338,65.871 120.576,65.871 120.899,65.548 D25.2@120.899,65.535
NetD26_2: D26.2 DZ7.2 | length 4.6
  L6 BOT w0.254: DZ7.2@122.754,68.45 123.066,68.137 123.338,68.137 125.604,65.871 125.843,65.871 126.166,65.548 D26.2@126.166,65.535
NetD27_2: D27.2 DZ8.2 | length 4.6
  L6 BOT w0.254: DZ8.2@128.02,68.323 128.333,68.01 128.605,68.01 130.87,65.744 131.109,65.744 131.432,65.421 D27.2@131.432,65.408
NetD28_2: D28.2 DZ9.2 | length 4.6
  L6 BOT w0.254: DZ9.2@154.351,68.348 154.664,68.035 154.936,68.035 157.202,65.77 157.44,65.77 157.763,65.447 D28.2@157.763,65.434
NetD29_2: D29.2 DZ10.2 | length 4.6
  L6 BOT w0.254: DZ10.2@159.617,68.348 159.93,68.035 160.202,68.035 162.468,65.77 162.706,65.77 163.029,65.447 D29.2@163.029,65.434
NetD30_2: D30.2 DZ11.2 | length 4.6
  L6 BOT w0.254: DZ11.2@164.884,68.348 165.197,68.035 165.468,68.035 167.734,65.77 167.973,65.77 168.296,65.447 D30.2@168.296,65.434
NetD31_2: D31.2 DZ12.2 | length 4.6
  L6 BOT w0.254: DZ12.2@170.15,68.348 170.463,68.035 170.735,68.035 173,65.77 173.239,65.77 173.562,65.447 D31.2@173.562,65.434
NetD32_2: D32.2 DZ13.2 | length 4.6
  L6 BOT w0.254: DZ13.2@133.286,68.348 133.599,68.035 133.871,68.035 136.136,65.77 136.375,65.77 136.698,65.447 D32.2@136.698,65.434
NetD33_2: D33.2 DZ14.2 | length 4.6
  L6 BOT w0.254: DZ14.2@138.552,68.45 138.865,68.137 139.137,68.137 141.403,65.871 141.641,65.871 141.964,65.548 D33.2@141.964,65.535
NetD34_2: D34.2 DZ15.2 | length 4.6
  L6 BOT w0.254: DZ15.2@143.819,68.348 144.132,68.035 144.403,68.035 146.669,65.77 146.908,65.77 147.231,65.447 D34.2@147.231,65.434
NetD35_2: D35.2 DZ16.2 | length 4.6
  L6 BOT w0.254: DZ16.2@149.085,68.348 149.398,68.035 149.67,68.035 151.935,65.77 152.174,65.77 152.497,65.447 D35.2@152.497,65.434
NetDS1_1: DS1.1 R8.2
NetDS2_1: DS2.1 R9.2
NetDS3_1: DS3.1 R253.2
NetDS4_1: DS4.1 R256.2
NetDS5_1: DS5.1 R413.2
NetDS6_1: DS6.1 R420.2
NetDS7_1: DS7.1 R428.2
NetDS8_1: DS8.1 R436.2
NetDS9_1: DS9.1 R138.2
NetDS10_1: DS10.1 R222.2
NetDS11_2: DS11.2 R298.1
NetDS12_2: DS12.2 R537.1
NetDS13_2: DS13.2 R538.1
NetJ5_4: J5.4 R119.2 | length 3.5
  L1 TOP w0.254: R119.2@47.498,69.867 47.498,70.634 cw(c47.752,70.634) 47.572,70.813 48.395,71.636 ccw(c48.215,71.816) 48.469,71.816 48.469,72.793 J5.4@48.574,72.898
NetJ13_2: J13.2 R207.2 U18.6
NetJ13_5: J13.5 R208.2 U18.7
NetJ14_2: J14.2 R215.2 U19.6
NetJ14_5: J14.5 R216.2 U19.7
NetJ15_2: J15.2 R218.2 U20.7
NetJ15_3: J15.3 R219.2 U20.6
NetJ27_2: J27.2 R192.2 U45.6
NetJ27_5: J27.5 R347.2 U45.7
NetJ28_2: J28.2 R463.2 U46.6
NetJ28_5: J28.5 R464.2 U46.7
NetJ31_1: J31.1 U50.6
NetJ31_2: J31.2 U50.10
NetJP4_1: JP4.1 R409.2
NetJP4_2: JP4.2 R410.2 U34.3
NetL7_1: L7.1 U51.11
NetL8_1: L8.1 U51.14
NetL9_1: L9.1 U51.27
NetL10_1: L10.1 U51.30
NetQ1_1: Q1.1 R112.2 R113.2 | length 4.2
  L1 TOP w0.254: v2(39.37,69.85) R113.2@39.37,69.867
  L6 BOT w0.254: Q1.1@35.971,70.286 36.144,69.753 36.548,69.349 ccw(c36.728,69.528) 36.728,69.274 38.689,69.274 ccw(c38.689,69.528) 38.869,69.349 39.22,69.7 v2(39.37,69.85)
NetQ1_3: Q1.3 R114.1 | length 3.3
  L1 TOP w0.254: R114.1@34.544,68.817 34.544,68.199 ccw(c34.798,68.199) 34.798,67.945 v2(35.052,67.945)
  L6 BOT w0.254: v2(35.052,67.945) 36.748,67.945 Q1.3@36.921,68.286
NetQ2_1: Q2.1 R117.2 R118.2 | length 4.2
  L1 TOP w0.254: v2(52.324,69.85) R118.2@52.324,69.867
  L6 BOT w0.254: Q2.1@48.925,70.286 49.098,69.753 49.502,69.349 ccw(c49.682,69.528) 49.682,69.274 51.643,69.274 ccw(c51.643,69.528) 51.823,69.349 52.174,69.7 v2(52.324,69.85)
NetQ2_3: Q2.3 R119.1 | length 3.3
  L1 TOP w0.254: R119.1@47.498,68.817 47.498,68.199 ccw(c47.752,68.199) 47.752,67.945 v2(48.006,67.945)
  L6 BOT w0.254: v2(48.006,67.945) 49.702,67.945 Q2.3@49.875,68.286
NetQ3_1: Q3.1 R152.2 R155.2
NetQ4_1: Q4.1 R153.2 R156.2
NetQ5_1: Q5.1 R154.2 R157.2
NetQ6_1: Q6.1 R158.2 R161.2
NetQ7_1: Q7.1 R159.2 R162.2
NetQ8_1: Q8.1 R160.2 R163.2
NetQ9_1: Q9.1 R164.2 R165.2
NetQ10_1: Q10.1 R166.2 R167.2
NetQ11_1: Q11.1 R466.1 R470.2
NetQ12_1: Q12.1 R467.1 R471.2
NetQ13_1: Q13.1 R468.1 R472.2
NetQ14_1: Q14.1 R469.1 R473.2
NetQ15_1: Q15.1 R474.1 R478.2
NetQ16_1: Q16.1 R475.1 R479.2
NetQ17_1: Q17.1 R476.1 R480.2
NetQ18_1: Q18.1 R477.1 R481.2
NetQ19_1: Q19.1 R201.1 R493.2
NetQ20_1: Q20.1 R202.1 R494.2
NetQ21_1: Q21.1 R491.1 R495.2
NetQ22_1: Q22.1 R492.1 R496.2
NetQ23_1: Q23.1 R497.1 R501.2
NetQ24_1: Q24.1 R498.1 R502.2
NetQ25_1: Q25.1 R499.1 R503.2
NetQ26_1: Q26.1 R500.1 R504.2
NetQ27_3: Q27.3 R350.2 Y2.1
NetR1_1: R1.1 R4.1 U1.1 | length 2.5
  L1 TOP w0.254: R1.1@7.648,15.883 R4.1@7.648,14.867 7.963,14.867 cw(c7.963,14.613) 8.142,14.793 8.318,14.617 ccw(c8.497,14.797) 8.497,14.543 U1.1@8.979,14.543
NetR2_1: R2.1 U1.3 | length 1.7
  L1 TOP w0.254: R2.1@7.648,12.835 7.661,12.835 7.832,13.006 7.832,13.138 8.312,13.618 U1.3@8.976,13.618
NetR3_1: R3.1 U1.4 | length 2
  L1 TOP w0.254: R3.1@7.652,11.819 7.661,11.819 7.846,12.004 7.846,12.013 8.778,12.945 8.778,13.12 8.801,13.143 U1.4@8.976,13.143
NetR4_2: R4.2 R5.2 U1.2 | length 2.9
  L1 TOP w0.254: R4.2@6.598,14.867 6.611,14.867 6.796,14.682 6.796,14.669 7.469,13.996 7.503,13.996 R5.2@7.648,13.851 ; R5.2@7.542,14.069 U1.2@8.979,14.067 U1.2@8.979,14.067
NetR7_1: R7.1 R10.2 U2.4
NetR129_1: R129.1 R204.2 U43.2 | length 2.3
  L1 TOP w0.254: R204.2@7.761,23.241 7.761,23.744 ; R129.1@7.761,24.257 7.761,23.744 ; U43.2@8.905,23.467 8.828,23.467 8.826,23.469 8.579,23.469 8.304,23.744 7.761,23.744
NetR136_1: R136.1 U43.3 | length 1.6
  L1 TOP w0.254: R136.1@7.761,22.225 7.936,22.287 ccw(c7.77,22.479) 7.948,22.299 8.59,22.94 cw(c8.769,22.76) 8.768,23.014 U43.3@9.1,23.016
NetR137_1: R137.1 U43.4 | length 2
  L1 TOP w0.254: R137.1@7.761,21.209 7.92,21.368 7.992,21.368 8.902,22.278 8.902,22.518 8.925,22.541 U43.4@9.1,22.541
NetR146_2: R146.2 U10.23
NetR147_2: R147.2 U10.28
NetR148_2: R148.2 U10.22
NetR149_2: R149.2 U10.1
NetR168_1: R168.1 U11.1 U11.2
NetR169_1: R169.1 U12.1 U12.2
NetR174_1: R174.1 U11.6 U11.7
NetR175_1: R175.1 U12.6 U12.7
NetR180_1: R180.1 U13.1 U13.2
NetR181_1: R181.1 U14.1 U14.2
NetR186_1: R186.1 U13.6 U13.7
NetR187_1: R187.1 U14.6 U14.7
NetR211_1: R211.1 R224.2 U44.2 | length 2.3
  L1 TOP w0.254: R224.2@17.927,13.843 17.927,14.346 ; R211.1@17.927,14.859 17.927,14.346 ; U44.2@19.071,14.069 18.994,14.069 18.992,14.071 18.745,14.071 18.47,14.346 17.927,14.346
NetR212_1: R212.1 U44.3 | length 1.6
  L1 TOP w0.254: R212.1@17.927,12.827 18.102,12.889 ccw(c17.936,13.081) 18.114,12.901 18.756,13.542 cw(c18.935,13.362) 18.934,13.616 U44.3@19.266,13.618
NetR214_1: R214.1 U44.4 | length 2
  L1 TOP w0.254: R214.1@17.927,11.811 18.086,11.97 18.158,11.97 19.068,12.88 19.068,13.12 19.091,13.143 U44.4@19.266,13.143
NetR249_1: R249.1 R254.2 U24.2 | length 2.3
  L1 TOP w0.254: R254.2@7.764,32.766 7.764,33.269 ; R249.1@7.764,33.782 7.764,33.269 ; U24.2@8.908,32.992 8.831,32.992 8.829,32.994 8.582,32.994 8.307,33.269 7.764,33.269
NetR250_1: R250.1 U24.3 | length 1.6
  L1 TOP w0.254: R250.1@7.764,31.75 7.939,31.812 ccw(c7.773,32.004) 7.951,31.824 8.593,32.465 cw(c8.772,32.285) 8.771,32.539 U24.3@9.103,32.541
NetR251_1: R251.1 U24.4 | length 2
  L1 TOP w0.254: R251.1@7.764,30.734 7.923,30.893 7.995,30.893 8.905,31.803 8.905,32.043 8.928,32.066 U24.4@9.103,32.066
NetR259_1: R259.1 U25.7
NetR262_1: R262.1 U26.7
NetR265_1: R265.1 U27.7
NetR268_1: R268.1 U28.7
NetR286_2: R286.2
NetR289_2: R289.2 R295.1 U48.5
NetR297_1: R297.1 R490.2 U49.1
NetR301_2: R301.2 U29.C6 | length 0.8
  L1 TOP w0.125: 66.587,49.6 v1(66.587,49.987)
  L6 BOT w0.1: v1(66.587,49.987) U29.C6@66.912,49.662
NetR302_1: R302.1 U29.H4 | length 5.4
  L1 TOP w0.2: v1(68.537,46.737) 68.576,46.737 68.776,46.937 71.78,46.937 72.955,45.762
  L6 BOT w0.2: U29.H4@68.212,46.412 v1(68.537,46.737)
NetR303_1: R303.1 U29.AA9 | length 3.9
  L6 BOT w0.125: 64.887,34.062 64.887,37.887 U29.AA9@64.962,37.962
NetR306_1: R306.1 U29.W15 | length 3.7
  L6 BOT w0.1: U29.W15@61.062,39.262 61.362,38.962 61.362,38.742 61.685,38.419 61.714,38.419 62.037,38.097 62.037,37.387 61.812,37.162 v1(61.812,36.037)
NetR307_2: R307.2 U29.D8 | length 2
  L1 TOP w0.1: v1(65.937,49.337) 65.937,50.525 66.099,50.686 66.099,50.689 66.185,50.775 66.187,50.775
  L6 BOT w0.1: U29.D8@65.612,49.012 v1(65.937,49.337)
NetR310_2: R310.2 U29.B7 | length 4.7
  L6 BOT w0.1: U29.B7@66.262,50.312 66.587,50.637 66.587,54.875
NetR311_1: R311.1 U29.P16 | length 4
  L1 TOP w0.1: v1(58.287,43.162) 58.287,43.137 58.687,42.737 59.187,42.737 59.287,42.637 59.562,42.637
  L6 BOT w0.1: v1(58.287,43.162) 58.287,42.937 58.387,42.837 60.087,42.837 U29.P16@60.412,42.512
NetR313_1: R313.1 U29.K15 | length 7.4
  L6 BOT w0.1: 54.587,44.862 54.712,44.987 60.687,44.987 60.812,45.112 U29.K15@61.062,45.112
  L6 BOT w0.125: 53.75,44.862 54.587,44.862
NetR315_1: R315.1 U29.J10 | length 3
  L1 TOP w0.1: v1(64.637,45.437) 64.637,45.737 64.587,45.787 64.587,47.562 64.675,47.65 64.912,47.65
  L6 BOT w0.1: U29.J10@64.312,45.762 v1(64.637,45.437)
NetR317_1: R317.1 U29.D14 | length 4
  L6 BOT w0.1: U29.D14@61.712,49.012 62.037,49.337 62.037,51.837 61.812,52.062
  L6 BOT w0.125: 61.812,52.062 61.812,52.775
NetR321_2: R321.2 U29.R19 | length 5
  L6 BOT w0.125: 53.675,42.162 53.7,42.137 56.915,42.137 56.965,42.187 57.962,42.187 58.078,42.071 58.253,42.071 U29.R19@58.462,41.862
NetR322_1: R322.1 Y2.3
NetR326_1: R326.1 Y4.3
NetR331_2: R331.2 U51.22
NetR333_2: R333.2 U51.23
NetR335_2: R335.2 U51.8
NetR336_2: R336.2 U52.16
NetR337_2: R337.2 R526.1 U52.1
NetR338_1: R338.1 U52.6
NetR342_1: R342.1 U29.D19 U51.1 | length 5.7
  L1 TOP w0.125: 53.518,50.241 54.907,50.241 56.124,49.024 57.824,49.024 v1(58.137,49.337)
  L6 BOT w0.1: v1(58.137,49.337) U29.D19@58.462,49.012
NetR343_1: R343.1 U51.5
NetR345_1: R345.1 U51.6
NetR346_2: R346.2 R348.1 U51.18
NetR386_2: R386.2 U29.N15 | length 9.3
  L6 BOT w0.1: 55.337,43.187 55.637,43.487 60.511,43.487 60.836,43.162 U29.N15@61.062,43.162
  L6 BOT w0.125: 52.037,43.187 55.337,43.187
NetR401_2: R401.2 U31.1
NetR403_1: R403.1 U33.7
NetR404_1: R404.1 U33.3
NetR406_1: R406.1 U32.1
NetR407_1: R407.1 R408.2 U34.6
NetR412_1: R412.1 R415.2 U35.4
NetR417_1: R417.1 R422.2 U36.2 | length 2.3
  L1 TOP w0.254: R422.2@7.764,42.037 7.764,42.54 ; R417.1@7.764,43.053 7.764,42.54 ; U36.2@8.908,42.263 8.831,42.263 8.829,42.265 8.582,42.265 8.307,42.54 7.764,42.54
NetR418_1: R418.1 U36.3 | length 1.6
  L1 TOP w0.254: R418.1@7.764,41.021 7.939,41.083 ccw(c7.773,41.275) 7.951,41.095 8.593,41.736 cw(c8.772,41.556) 8.771,41.81 U36.3@9.103,41.812
NetR419_1: R419.1 U36.4 | length 2
  L1 TOP w0.254: R419.1@7.764,40.005 7.923,40.164 7.995,40.164 8.905,41.074 8.905,41.314 8.928,41.337 U36.4@9.103,41.337
NetR425_1: R425.1 R430.2 U37.2 | length 2.3
  L1 TOP w0.254: R430.2@7.848,52.038 7.848,52.541 ; R425.1@7.848,53.054 7.848,52.541 ; U37.2@8.992,52.264 8.915,52.264 8.913,52.266 8.666,52.266 8.391,52.541 7.848,52.541
NetR426_1: R426.1 U37.3 | length 1.6
  L1 TOP w0.254: R426.1@7.848,51.022 8.023,51.084 ccw(c7.856,51.276) 8.035,51.095 8.676,51.737 cw(c8.856,51.557) 8.854,51.811 U37.3@9.187,51.813
NetR427_1: R427.1 U37.4 | length 2
  L1 TOP w0.254: R427.1@7.848,50.006 8.006,50.165 8.079,50.165 8.989,51.074 8.989,51.315 9.012,51.338 U37.4@9.187,51.338
NetR433_1: R433.1 R438.2 U38.2 | length 2.3
  L1 TOP w0.254: R438.2@7.863,61.968 7.863,62.471 ; R433.1@7.863,62.984 7.863,62.471 ; U38.2@9.007,62.194 8.93,62.194 8.928,62.196 8.681,62.196 8.406,62.471 7.863,62.471
NetR434_1: R434.1 U38.3 | length 1.6
  L1 TOP w0.254: R434.1@7.863,60.952 8.038,61.014 ccw(c7.871,61.206) 8.05,61.026 8.691,61.667 cw(c8.871,61.487) 8.869,61.741 U38.3@9.202,61.743
NetR435_1: R435.1 U38.4 | length 2
  L1 TOP w0.254: R435.1@7.863,59.936 8.022,60.095 8.094,60.095 9.004,61.005 9.004,61.245 9.027,61.268 U38.4@9.202,61.268
NetR440_2: R440.2 R441.2 U39.7 | length 2.4
  L1 TOP w0.254: U39.7@47.879,90.113 47.876,90.11 47.876,88.625 v2(47.872,88.622) 47.9,88.594 47.9,87.789 R440.2@47.948,87.742
NetR442_1: R442.1 R444.2 U39.6 | length 2.4
  L1 TOP w0.254: R444.2@46.551,87.742 v2(46.551,88.614) 46.578,88.642 46.578,89.255 46.556,89.255 U39.6@46.609,90.113
NetR443_2: R443.2 U39.8 | length 2.2
  L1 TOP w0.254: U39.8@49.149,90.113 49.26,90.002 49.26,88.076 R443.2@49.345,87.992
NetR445_2: R445.2 R446.2 U40.7 | length 2.4
  L1 TOP w0.254: U40.7@41.783,90.113 41.78,90.11 41.78,88.625 v2(41.776,88.622) 41.804,88.594 41.804,87.789 R445.2@41.852,87.742
NetR447_1: R447.1 R449.2 U40.6 | length 2.4
  L1 TOP w0.254: R449.2@40.455,87.742 v2(40.455,88.614) 40.482,88.642 40.482,89.255 40.46,89.255 U40.6@40.513,90.113
NetR448_2: R448.2 U40.8 | length 2.2
  L1 TOP w0.254: U40.8@43.053,90.113 43.164,90.002 43.164,88.076 R448.2@43.249,87.992
NetR450_2: R450.2 R451.2 U41.7 | length 2.4
  L1 TOP w0.254: U41.7@35.745,90.145 35.742,90.142 35.742,88.657 v2(35.739,88.654) 35.767,88.626 35.767,87.821 R450.2@35.814,87.774
NetR452_1: R452.1 R454.2 U41.6 | length 2.4
  L1 TOP w0.254: R454.2@34.417,87.774 v2(34.417,88.646) 34.445,88.674 34.445,89.287 34.423,89.287 U41.6@34.475,90.145
NetR453_2: R453.2 U41.8 | length 2.2
  L1 TOP w0.254: U41.8@37.015,90.145 37.127,90.034 37.127,88.108 R453.2@37.211,88.024
NetR482_2: R482.2 U47.1
NetR483_2: R483.2 U47.3
NetR484_2: R484.2 U48.6
NetR489_2: R489.2 U49.12
NetR526_2: R526.2 U29.D5 | length 4.2
  L1 TOP w0.1: v1(67.887,49.337) 68.187,49.637 68.187,50.311
  L1 TOP w0.125: 68.187,50.311 68.412,50.536 68.412,52.807
  L6 BOT w0.1: U29.D5@67.562,49.012 67.562,49.034 67.865,49.337 v1(67.887,49.337)